# EAGLE board Nusbio 2 - IC2 Extension (EAGLE 9.6.2)
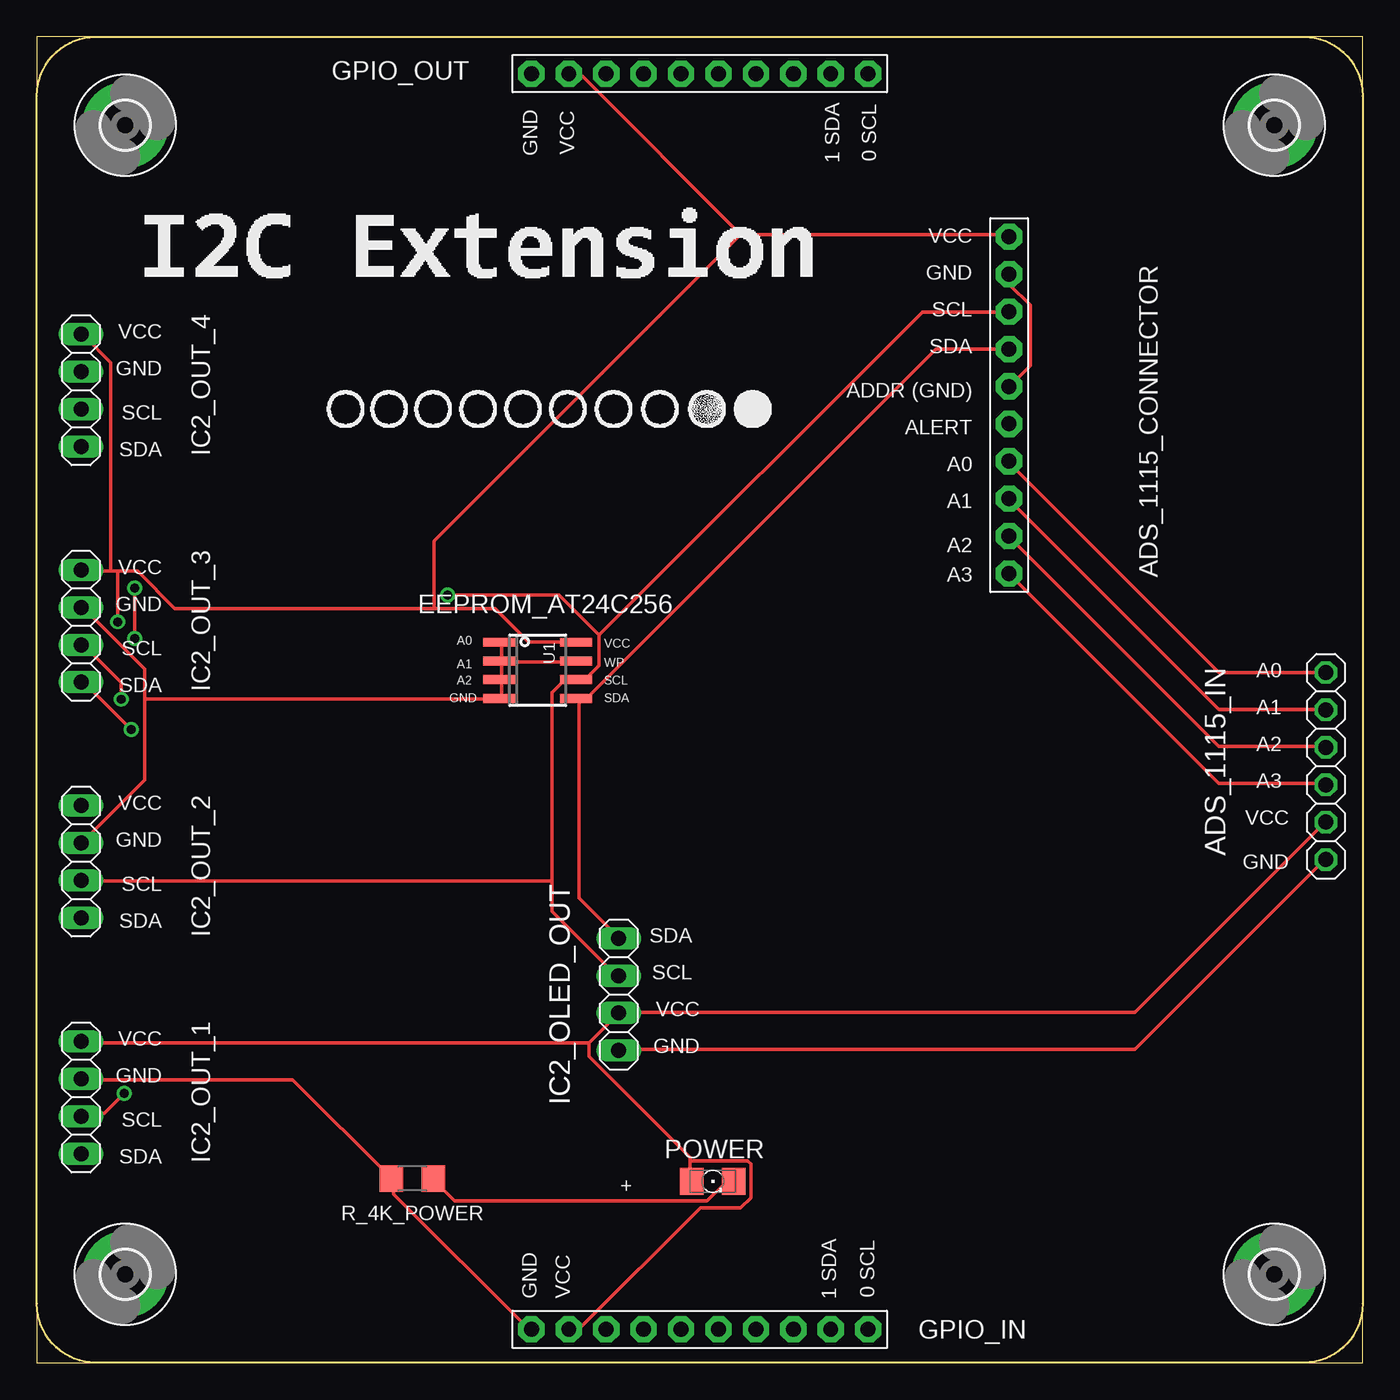
[diagram p0: board, top side]
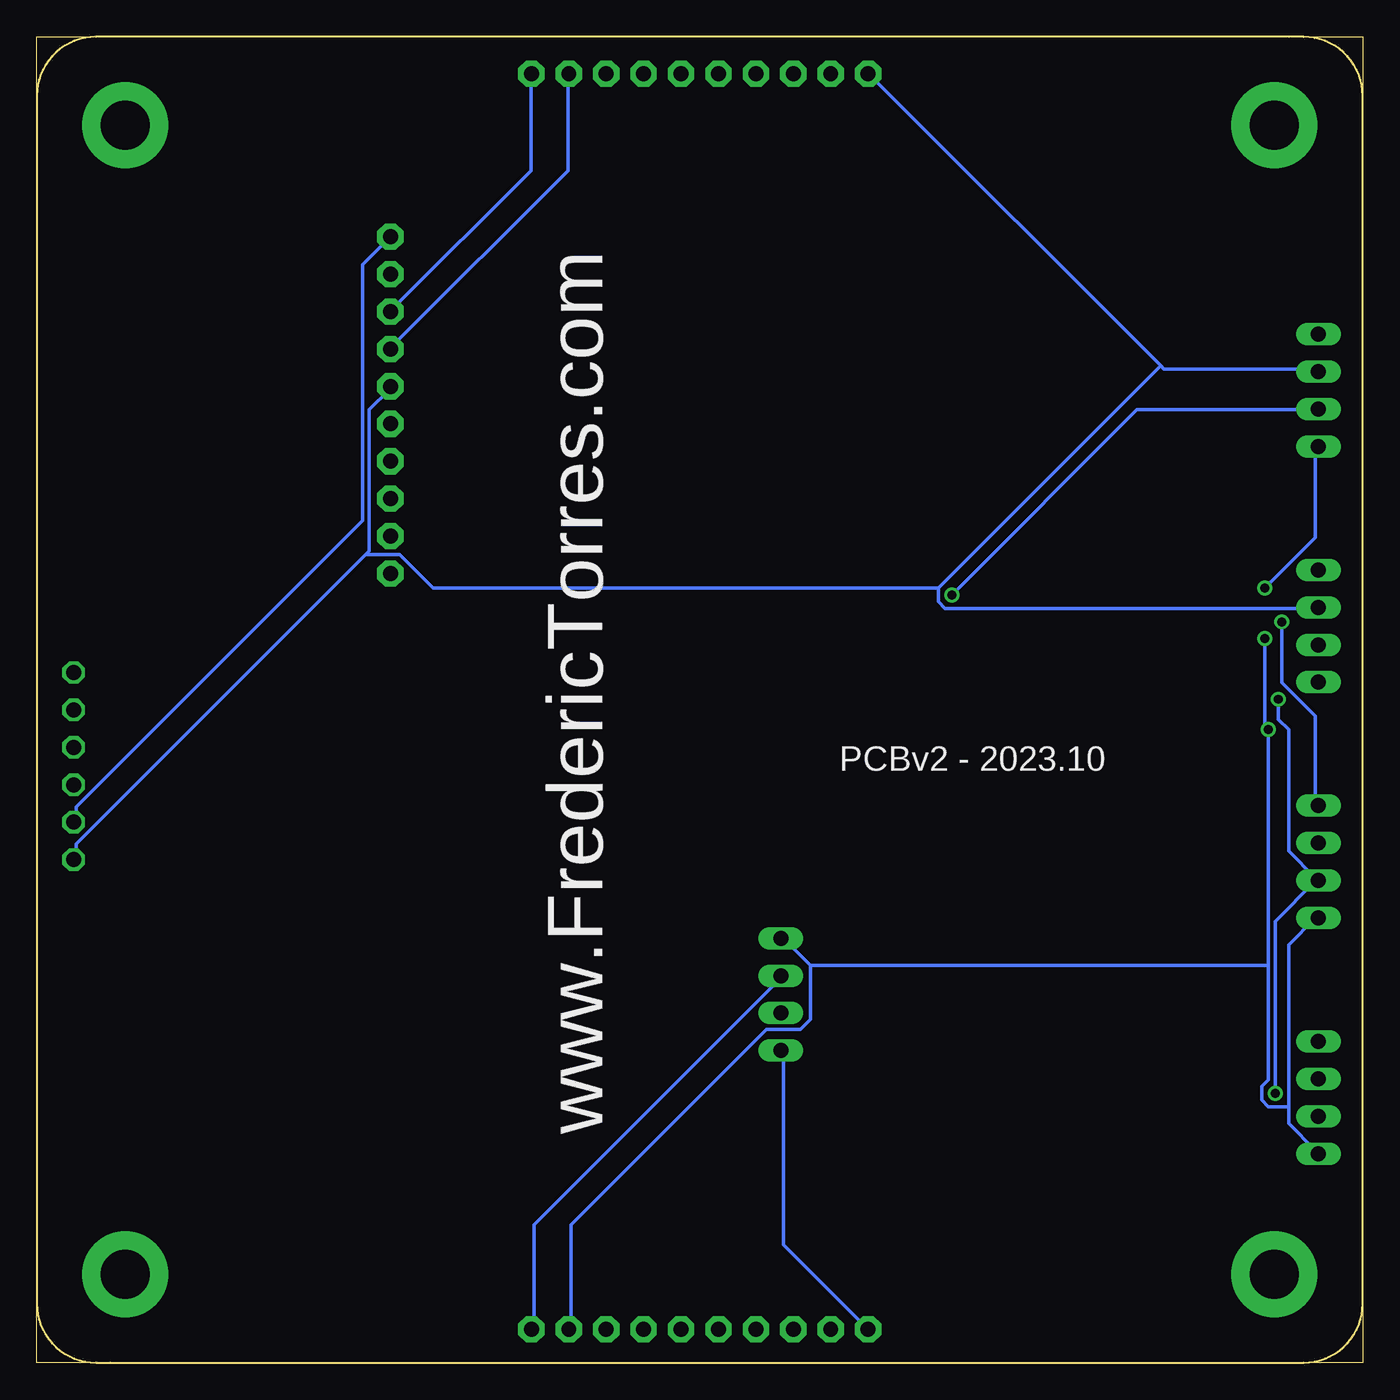
[diagram p1: board, bottom side, seen from below]

Size 90 x 90 mm. Coordinates in mm from the lower left corner, seen from the top.
Outline: 4,0 0,0 0,4
Outline: 4,0 7.5,0
Outline: 5.5,0 85,0
Outline: 85,0 90,0 90,4
Outline: 90,86 90,90 86,90
Outline: 5,90 0,90 0,86
Outline: 0,4 0,86
Outline: 0,86 arc-90 4,90 5,90
Outline: 5,90 86,90
Outline: 86,90 arc-90 90,86
Outline: 90,86 90,4
Outline: 90,4 arc-90 86,0 85,0
Outline: 85,0 4,0
Outline: 4,0 arc-90 0,4
Copper layers (1*16): Top 0.035mm / dielectric 1.5mm / Bottom 0.035mm
Design rules "default": minimum track width 10mil, minimum drill 24mil, track to track 8mil, track to pad 8mil, pad to pad 8mil, via to via 8mil, smd to smd 8mil, copper to edge 40mil, drill to drill 8mil, minimum pad ring 10mil, minimum via ring 8mil, stop-mask expansion 4mil, vias tented up to drill 0mil, thermal gap 10mil

## Footprints (pad centres in the part's own frame; a part is rotated, then mirrored left to right if it is on the bottom)
1X10-BIG = drill 1.016 pad 1.778 octagon: 1 -11.43,0; 2 -8.89,0; 3 -6.35,0; 4 -3.81,0; 5 -1.27,0; 6 1.27,0; 7 3.81,0; 8 6.35,0; 9 8.89,0; 10 11.43,0
1X06 = drill 1.016 octagon: 1 -6.35,0; 2 -3.81,0; 3 -1.27,0; 4 1.27,0; 5 3.81,0; 6 6.35,0
3,3-PAD = drill 3.3 pad 5.842: B3,3 0,0
1X04 = drill 1.016 long: 1 -3.81,0; 2 -1.27,0; 3 1.27,0; 4 3.81,0
1206 = smd 1.6 x 1.803: A -1.422,0; C 1.422,0
R1206 = smd 1.6 x 1.803: 1 -1.422,0; 2 1.422,0
SOIC8_150MIL = smd 0.6 x 2.2: 1 -1.905,-2.6; 2 -0.635,-2.6; 3 0.635,-2.6; 4 1.905,-2.6; 5 1.905,2.6; 6 0.635,2.6; 7 -0.635,2.6; 8 -1.905,2.6

## Placement (x,y rotation side)
ADS_1115_CONNECTOR  PINHD-1X10  [1X10-BIG]  66,65 270 top
ADS_1115_IN  [1X06]  87.5,40.5 90 top
GPIO_IN  PINHD-1X10  [1X10-BIG]  45,2.26 180 top
GPIO_OUT  PINHD-1X10  [1X10-BIG]  45,87.5 180 top
H1  MOUNT-PAD-ROUND3.3  [3,3-PAD]  6,84 0 top
H2  MOUNT-PAD-ROUND3.3  [3,3-PAD]  84,84 0 top
H3  MOUNT-PAD-ROUND3.3  [3,3-PAD]  6,6 0 top
H4  MOUNT-PAD-ROUND3.3  [3,3-PAD]  84,6 0 top
IC2_OLED_OUT  [1X04]  39.5,25 90 top
IC2_OUT_1  [1X04]  3,18 270 top
IC2_OUT_2  [1X04]  3,34 270 top
IC2_OUT_3  [1X04]  3,50 270 top
IC2_OUT_4  [1X04]  3,66 270 top
LED_POWER  [1206]  45.89,12.31 0 top
R_4K_POWER  [R1206]  25.5,12.5 0 top
U1  [SOIC8_150MIL]  34,47 270 top

## Library data of the parts
ADS_1115_CONNECTOR ADS_1115_IN GPIO_IN GPIO_OUT LED_POWER R_4K_POWER = adafruit
H1-H4 = holes
IC2_OLED_OUT IC2_OUT_1-IC2_OUT_4 = pinhead
U1 = microbuilder

## Nets
ADS_A0: ADS_1115_CONNECTOR.7 ADS_1115_IN.6
ADS_A1: ADS_1115_CONNECTOR.8 ADS_1115_IN.5
ADS_A2: ADS_1115_CONNECTOR.9 ADS_1115_IN.4
ADS_A3: ADS_1115_CONNECTOR.10 ADS_1115_IN.3
ADS_ALERT: ADS_1115_CONNECTOR.6
GND: ADS_1115_CONNECTOR.2 ADS_1115_CONNECTOR.5 ADS_1115_IN.1 GPIO_IN.10 GPIO_OUT.10 IC2_OLED_OUT.1 IC2_OUT_1.2 IC2_OUT_2.2 IC2_OUT_3.2 IC2_OUT_4.2 R_4K_POWER.1 U1.1 U1.2 U1.3 U1.4 U1.7
N$2: LED_POWER.C R_4K_POWER.2
SCL: ADS_1115_CONNECTOR.3 GPIO_IN.1 GPIO_OUT.1 IC2_OLED_OUT.3 IC2_OUT_1.3 IC2_OUT_2.3 IC2_OUT_3.3 IC2_OUT_4.3 U1.6
SDA: ADS_1115_CONNECTOR.4 GPIO_IN.2 GPIO_OUT.2 IC2_OLED_OUT.4 IC2_OUT_1.4 IC2_OUT_2.4 IC2_OUT_3.4 IC2_OUT_4.4 U1.5
VCC: ADS_1115_CONNECTOR.1 ADS_1115_IN.2 GPIO_IN.9 GPIO_OUT.9 IC2_OLED_OUT.2 IC2_OUT_1.1 IC2_OUT_2.1 IC2_OUT_3.1 IC2_OUT_4.1 LED_POWER.A U1.8

## Tracks (layer width: path | path; a pad name or v marks a point on that pad's centre or on a via)
ADS_A0
  Top 0.254: ADS_1115_IN.6 87.33,46.86 80.24,46.86 66.06,61.04 ADS_1115_CONNECTOR.7
ADS_A1
  Top 0.254: ADS_1115_IN.5 87.33,44.35 80.24,44.35 66.06,58.52 ADS_1115_CONNECTOR.8
ADS_A2
  Top 0.254: ADS_1115_IN.4 87.33,41.83 80.24,41.83 66.06,56.01 ADS_1115_CONNECTOR.9
ADS_A3
  Top 0.254: ADS_1115_IN.3 87.33,39.32 80.24,39.32 66.06,53.49 ADS_1115_CONNECTOR.10
GND
  Top 0.254: U1.1 31.55,48.69 31.55,47.78 U1.2 31.55,47.55 | 31.55,47.55 36.58,47.55 U1.7 | 31.55,47.55 31.55,46.41 U1.3 31.55,46.18 31.55,45.26 U1.4 31.32,45.03 7.32,45.03 | 7.32,45.03 7.32,47.09 3.2,51.21 IC2_OUT_3.2 | 7.32,45.03 7.32,39.55 3.2,35.43 IC2_OUT_2.2 | GPIO_IN.10 33.38,2.29 24.23,11.43 24.23,12.34 R_4K_POWER.1 24,12.57 17.37,19.2 3.2,19.2 IC2_OUT_1.2 | ADS_1115_CONNECTOR.2 66.06,73.84 66.06,73.15 67.44,71.78 67.44,67.67 66.06,66.29 ADS_1115_CONNECTOR.5 | IC2_OLED_OUT.1 39.55,21.26 74.52,21.26 87.33,34.06 ADS_1115_IN.1
  Bottom 0.254: 13.72,67.67 33.38,87.33 GPIO_OUT.10 | 13.72,67.67 13.49,67.44 3.2,67.44 IC2_OUT_4.2 | 28.8,52.58 28.8,51.66 28.35,51.21 3.2,51.21 IC2_OUT_3.2 | 13.72,67.67 28.8,52.58 | IC2_OLED_OUT.1 39.32,21.03 39.32,8 33.6,2.29 GPIO_IN.10 | 67.67,54.86 67.44,55.09 67.44,64.69 66.06,66.06 ADS_1115_CONNECTOR.5 | 67.67,54.86 87.33,35.2 87.33,34.29 ADS_1115_IN.1 | 28.8,52.58 63.09,52.58 65.38,54.86 67.67,54.86
N$2
  Top 0.254: LED_POWER.C 47.09,12.12 46.63,12.12 45.49,10.97 28.35,10.97 26.98,12.34 R_4K_POWER.2
SCL  (via drill 0.61)
  Top 0.254: v5.94,18.29 4.57,16.92 3.2,16.92 IC2_OUT_1.3 | v5.71,45.03 5.71,46.18 3.2,48.69 IC2_OUT_3.3 | 34.98,32.69 34.98,30.63 39.32,26.29 IC2_OLED_OUT.3 | 34.98,32.69 34.98,45.49 35.66,46.18 36.58,46.18 U1.6 36.8,46.41 37.26,46.41 38.18,47.32 38.18,49.38 | v27.89,52.12 35.43,52.12 38.18,49.38 | 38.18,49.38 60.12,71.32 65.84,71.32 ADS_1115_CONNECTOR.3 | 34.98,32.69 3.2,32.69 IC2_OUT_2.3
  Bottom 0.254: v5.94,18.29 5.94,29.95 3.2,32.69 IC2_OUT_2.3 3.2,32.92 5.03,34.75 5.03,42.98 5.71,43.66 v5.71,45.03 | GPIO_OUT.1 56.46,87.33 56.46,80.92 65.84,71.55 ADS_1115_CONNECTOR.3 | v27.89,52.12 15.32,64.69 3.2,64.69 IC2_OUT_4.3 | GPIO_IN.1 56.24,2.29 56.24,9.37 39.55,26.06 IC2_OLED_OUT.3
SDA  (via drill 0.61)
  Top 0.254: v6.4,42.98 3.2,46.18 IC2_OUT_3.4 | v6.63,49.15 v6.63,52.58 | IC2_OLED_OUT.4 39.32,29.03 36.8,31.55 36.8,45.03 U1.5 36.8,45.26 37.49,45.26 61.04,68.81 65.84,68.81 ADS_1115_CONNECTOR.4
  Bottom 0.254: 5.03,17.37 5.03,28.35 3.2,30.18 IC2_OUT_2.4 | 5.03,17.37 5.03,16.23 3.2,14.4 IC2_OUT_1.4 | 6.4,26.98 6.4,19.2 6.86,18.75 6.86,17.83 6.4,17.37 5.03,17.37 | 6.4,26.98 v6.4,42.98 6.63,43.2 v6.63,49.15 | v6.63,52.58 3.2,56.01 3.2,62.18 IC2_OUT_4.4 | GPIO_OUT.2 53.95,87.33 53.95,80.92 65.84,69.04 ADS_1115_CONNECTOR.4 | 37.49,26.98 37.49,23.32 38.18,22.63 40.46,22.63 53.72,9.37 53.72,2.29 GPIO_IN.2 | 37.49,26.98 39.32,28.8 IC2_OLED_OUT.4 | 37.49,26.98 6.4,26.98
VCC  (via drill 0.61)
  Top 0.254: 44.35,13.72 44.35,13.95 37.49,20.8 37.49,21.72 | 44.35,13.72 44.35,12.34 LED_POWER.A | 37.49,21.72 39.32,23.55 IC2_OLED_OUT.2 39.55,23.77 74.52,23.77 87.33,36.58 ADS_1115_IN.2 | 37.49,21.72 3.2,21.72 IC2_OUT_1.1 | 44.35,13.72 48.23,13.72 48.46,13.49 48.46,11.2 47.78,10.52 45.03,10.52 36.8,2.29 36.12,2.29 GPIO_IN.9 | 26.98,51.21 9.37,51.21 6.86,53.72 5.49,53.72 | 26.98,51.21 31.09,51.21 33.38,48.92 36.58,48.92 U1.8 | 5.03,53.72 3.2,53.72 IC2_OUT_3.1 | 5.03,53.72 5.49,53.72 | 5.49,53.72 v5.49,50.29 | 5.03,53.72 5.03,67.89 3.2,69.72 IC2_OUT_4.1 | 47.78,76.58 37.03,87.33 36.12,87.33 GPIO_OUT.9 | 47.78,76.58 65.84,76.58 ADS_1115_CONNECTOR.1 | 26.98,51.21 26.98,55.78 47.78,76.58
  Bottom 0.254: v5.49,50.29 5.49,46.18 3.2,43.89 3.2,37.95 IC2_OUT_2.1 | ADS_1115_IN.2 87.33,36.8 87.33,37.72 67.89,57.15 67.89,74.52 66.06,76.35 ADS_1115_CONNECTOR.1

## Text on the board
tNames: GND | VCC | 1 SDA | 0 SCL | VCC | GND | SCL | VCC | SDA | GND | ADDR (GND) | SCL | ALERT | SDA | A0 | A1 | A2 | VCC | A3 | GND | EEPROM_AT24C256 | SCL | A0 | VCC | A0 | A1 | WP | SDA | A2 | SCL | GND | SDA | A1 | A2 | A3 | VCC | VCC | GND | GND | SCL | SDA | SDA | SCL | VCC | VCC | GND | GND | SCL | SDA | POWER | + | GND | VCC | 1 SDA | 0 SCL
bNames: www.FredericTorres.com | PCBv2 - 2023.10